# Allegro board MB1166.brd
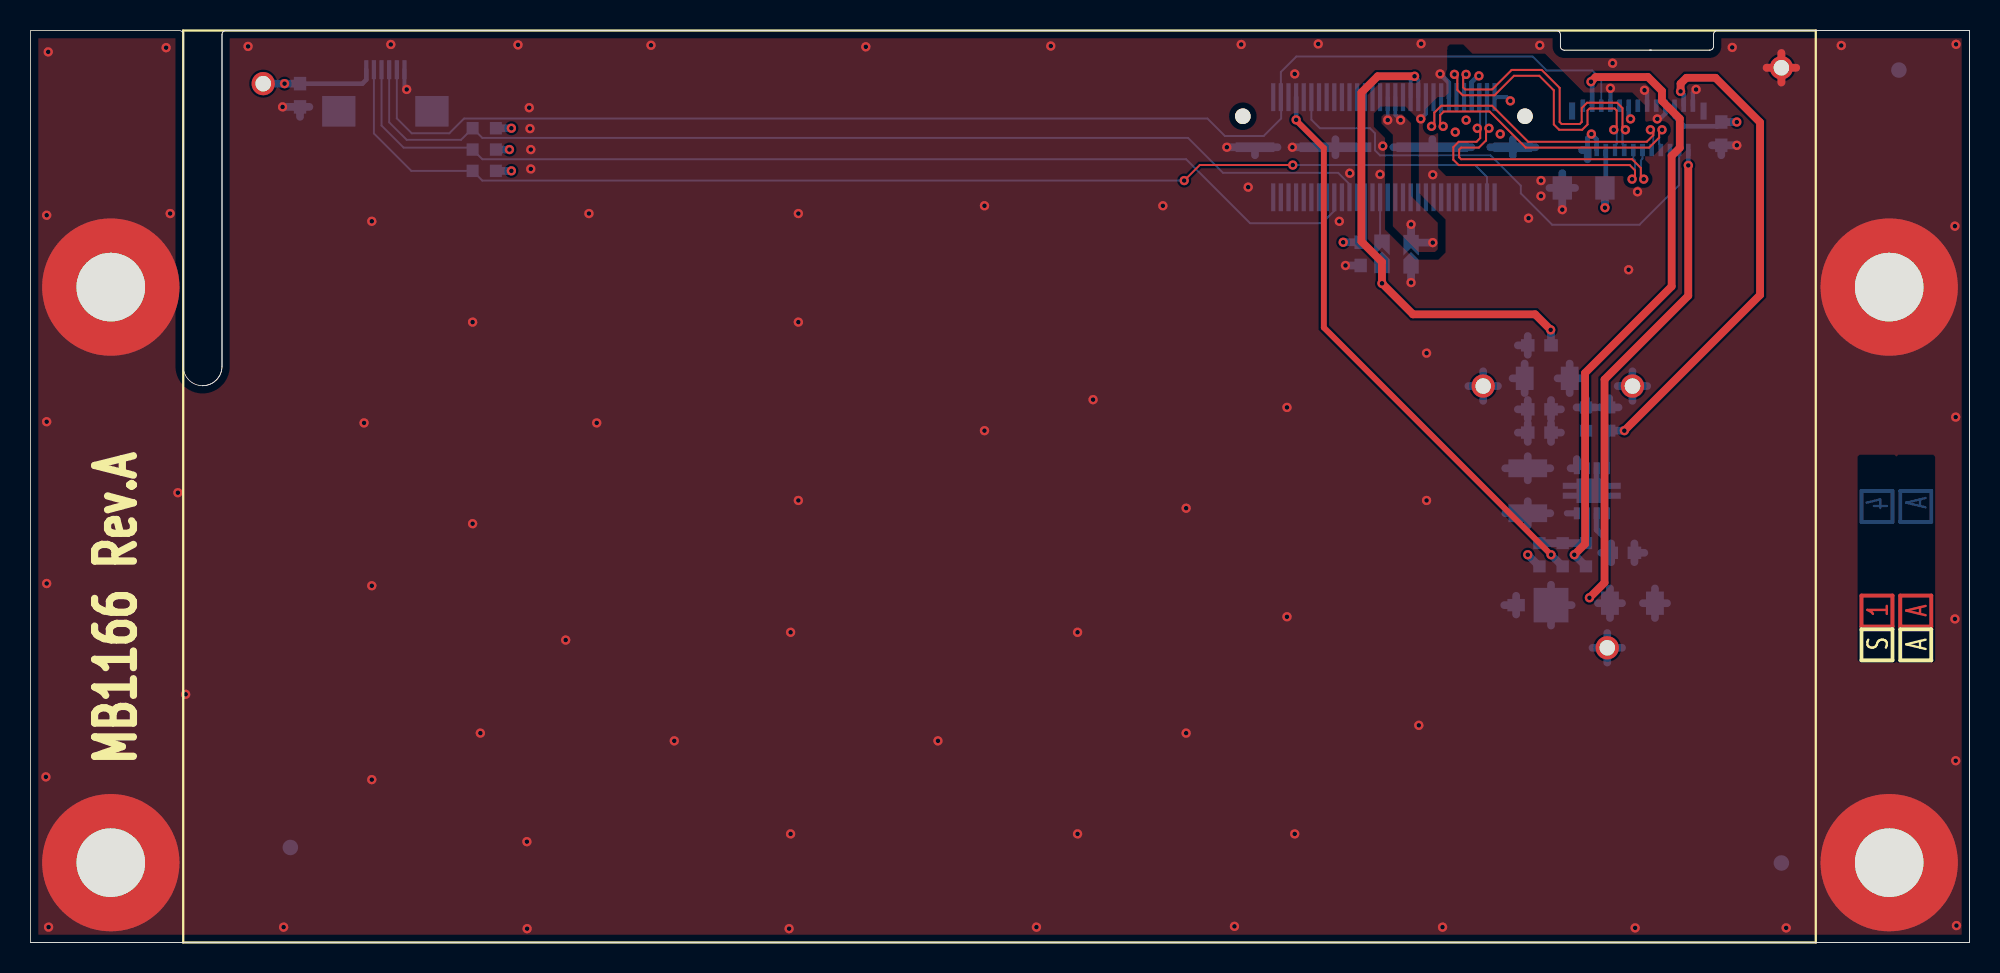
[diagram p0: board, top side]
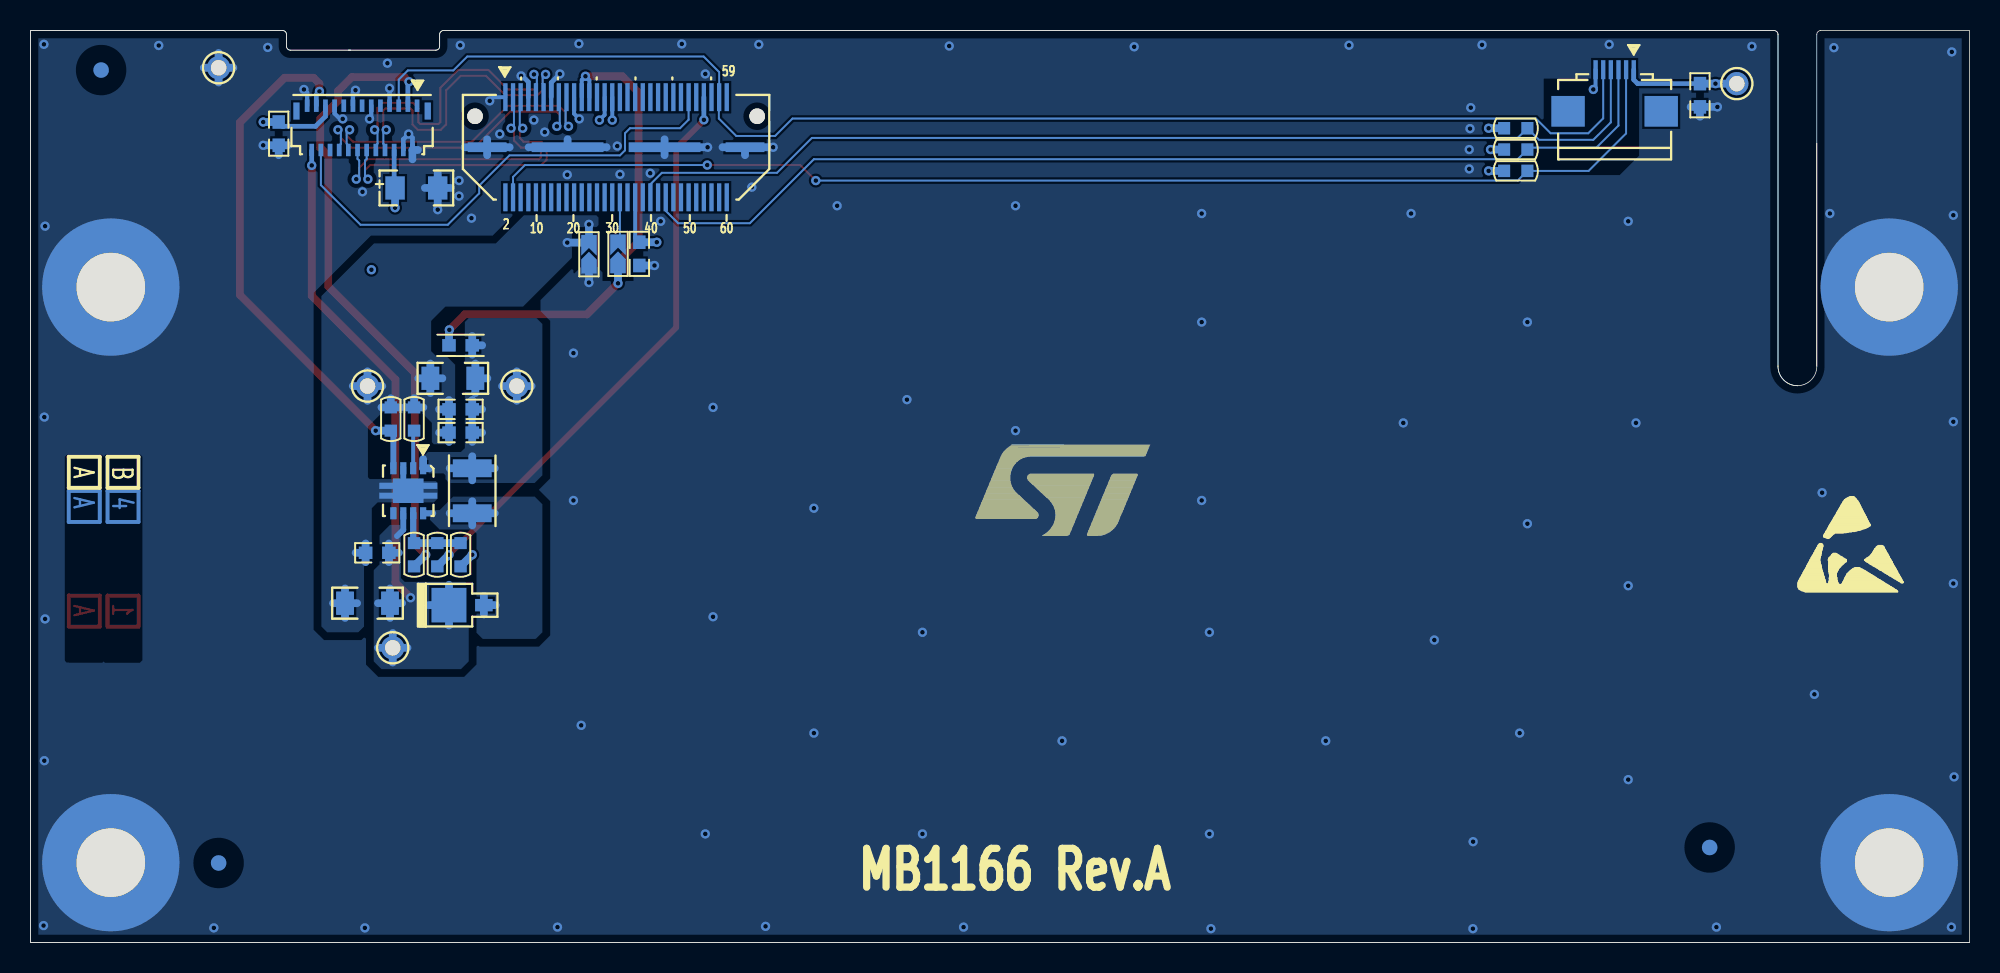
[diagram p1: board, bottom side, seen from below]

Outline 127 x 59.74 mm; copper layers: TOP, L2_GND, L3_VCC, BOTTOM. Coordinates in mm from the lower left corner of the outline.
Outline path: 0,0 0,59.74 9.75,59.74 arc(9.93,59.67) 10,59.49 10,52.35 ; 0,0 127,0 ; 0,0 127,0 ; 127,0 127,59.74 ; 127,0 127,59.74 ; 10,52.35 10,37.74 ; 10,52.35 10,37.74 ; 10,37.74 arc(10.37,36.85) 11.27,36.47 ; 11.27,36.47 arc(12.17,36.85) 12.54,37.74 ; 11.27,36.47 arc(12.17,36.85) 12.54,37.74 ; 12.54,59.49 12.54,37.74 ; 12.54,59.49 arc(12.62,59.67) 12.79,59.74 ; 12.54,59.49 arc(12.62,59.67) 12.79,59.74 ; 12.54,59.49 12.54,37.74 ; 12.79,59.74 99.95,59.74 ; 12.79,59.74 99.95,59.74 ; 99.95,59.74 arc(100.13,59.67) 100.2,59.49 ; 99.95,59.74 arc(100.13,59.67) 100.2,59.49 ; 100.2,59.49 100.2,58.71 ; 100.2,59.49 100.2,58.71 ; 100.2,58.71 arc(100.28,58.53) 100.46,58.45 ; 100.2,58.71 arc(100.28,58.53) 100.46,58.45 ; 100.46,58.45 106.17,58.45 ; 100.46,58.45 106.17,58.45 ; 106.17,58.45 106.05,58.45 ; 106.05,58.45 109.98,58.45 ; 106.05,58.45 109.98,58.45 ; 109.98,58.45 arc(110.16,58.53) 110.24,58.71 ; 109.98,58.45 arc(110.16,58.53) 110.24,58.71 ; 110.24,59.49 110.24,58.71 ; 110.24,59.49 arc(110.31,59.67) 110.49,59.74 ; 110.24,59.49 arc(110.31,59.67) 110.49,59.74 ; 110.24,59.49 110.24,58.71 ; 110.49,59.74 127,59.74 ; 110.49,59.74 127,59.74

## Design rules (mm)
net group DIFFPAIR0: nets HSSI_CLK_N HSSI_CLK_P
net group DIFFPAIR1: nets HSSI_D0_N HSSI_D0_P
net group DIFFPAIR2: nets HSSI_D1_N HSSI_D1_P

## Placement (name value [footprint] x y rotation side)
C1  4.7uF_50V  [1206C]  104.93 22.23 0 bottom
C2  10nF  [0603C]  104.29 25.53 180 bottom
C3  100nF  [0603C]  98.83 34.92 180 bottom
C4  10nF  [0603C]  98.83 33.4 180 bottom
C5  4.7uF_10V  [1206C]  99.34 36.96 0 bottom
C6  4.7uF  [TAN-A]  101.73 49.43 0 bottom
C7  100nF  [0603C]  110.74 52.98 90 bottom
C8  100nF  [0603C]  87.12 45.11 90 bottom
C9  100nF  [0603C]  17.65 55.5 90 bottom
CN1  -  [QTH-030-02-F-D-A]  88.65 52.09 180 bottom
CN2  FH26-25S-0.3SHW  [FPC25_FPC03025-1420]  105.28 53.36 0 bottom
CN3  FH19C-6S-05SH  [FH19C-6S-0R5SH_FPC_CPT]  23.24 57.17 180 bottom
H1  POSITION HOLE  [HOLE_C9D4R5]  121.74 5.23 0 top
H2  POSITION HOLE  [HOLE_C9D4R5]  5.26 5.23 0 top
H3  POSITION HOLE  [HOLE_C9D4R5]  121.74 42.93 0 top
H4  POSITION HOLE  [HOLE_C9D4R5]  5.26 42.93 0 top
L1  BEAD  [0603L]  98.83 39.12 180 bottom
L2  4.7uH(1A)  [1210L]  98.07 29.59 270 bottom
NOREF  -  []  0 0 0 top
NOREF#2  -  []  0 0 90 top
NOREF#3  -  []  121.7 21.71 90 top
NOREF#4  -  []  4.06 -24.89 0 top
NOREF#5  Value  []  63.47 29.87 0 top
NOREF#6  -  []  0 0 0 top
NOREF#7  -  []  177.24 162.03 0 top
NOREF#8  -  []  124.24 21.71 90 top
NOREF#9  -  []  -2.29 97 0 top
NOREF#10  -  []  166.72 127.75 0 top
NOREF#11  -  []  371.09 -81.28 0 top
NOREF#12  -  [unnamed#2]  114.68 5.21 180 bottom
NOREF#13  -  [unnamed#2]  122.38 57.15 180 bottom
NOREF#14  -  [unnamed#2]  17.02 6.22 180 bottom
R1  0  [0603R]  101.88 25.4 270 bottom
R2  100K  [0603R]  101.88 34.29 90 bottom
R3  10  [0603R]  103.4 34.29 270 bottom
R4  [N_A]  [0603R]  100.35 25.4 270 bottom
R5  4K7  [0603R]  98.83 25.4 270 bottom
R6  [N_A]  [0603R]  29.72 51.94 0 bottom
R7  [N_A]  [0603R]  29.72 53.34 0 bottom
R8  4K7  [0603R]  29.72 50.55 180 bottom
SB1  Open  [SB_0603]  88.52 45.11 270 bottom
SB2  Open  [SB_0603]  90.42 45.09 270 bottom
TP1  mco1  [TP]  114.68 57.3 180 bottom
TP2  mco1  [TP]  104.93 36.45 90 bottom
TP3  mco1  [TP]  15.24 56.26 0 bottom
TP4  mco1  [TP]  103.28 19.3 90 bottom
TP5  mco1  [TP]  95.15 36.45 90 bottom
U1  STLD40DPUR  [SON8_0R65_3X3]  102.26 29.59 0 bottom
Z1  STPS1L40M  [DO-216AA]  97.31 22.1 0 bottom

## Library data of the parts
C1 C5 = 1206C
C2-C4 C7-C9 = 0603C
C6 = TAN-A
CN1 = QTH-030-02-F-D-A
CN2 = FPC25_FPC03025-1420
CN3 = FH19C-6S-0R5SH_FPC_CPT
H1-H4 = HOLE_C9D4R5
L1 = 0603L
L2 = 1210L
R1-R8 = 0603R
SB1 SB2 = SB_0603
TP1-TP5 = TP
U1 = SON8_0R65_3X3
Z1 = DO-216AA

## Footprints (pads in the part's own frame, mm; a bottom-side part is the same pattern mirrored in y, then rotated)
0603C
  rect 0.889x0.813 smd: 1(-0.762,0) 2(0.762,0)
0603L
  rect 0.889x0.813 smd: 1(-0.762,0) 2(0.762,0)
0603R
  rect 0.787x0.813 smd: 1(-0.762,0) 2(0.762,0)
1206C
  rect 1.168x1.524 smd: 1(-1.473,0) 2(1.473,0)
1210L
  rect 1.168x2.54 smd: 1(-1.473,0) 2(1.473,0)
DO-216AA
  rect 1.143x0.813 smd: 1(0,0)
  rect 2.286x2.261 smd: 2(2.286,0)
FH19C-6S-0R5SH_FPC_CPT
  rect 0.279x1.245 smd: 1(1.25,0) 2(0.75,0) 3(0.25,0) 4(-0.25,0) 5(-0.75,0) 6(-1.25,0)
  rect 2.184x2.007 smd: 7(-3.05,-2.725) 8(3.05,-2.725)
FPC25_FPC03025-1420
  rect 0.406x1.118 smd: (-4.3,-1.1) (4.3,-1.1)
  rect 0.305x0.813 smd: 1(-3.6,-1.45) 2(-3.3,1.45) 3(-3,-1.45) 4(-2.7,1.45) 5(-2.4,-1.45) 6(-2.1,1.45) 7(-1.8,-1.45) 8(-1.5,1.45) 9(-1.2,-1.45) 10(-0.9,1.45) 11(-0.6,-1.45) 12(-0.3,1.45) 13(0,-1.45) 14(0.3,1.45) 15(0.6,-1.45) 16(0.9,1.45) 17(1.2,-1.45) 18(1.5,1.45) 19(1.8,-1.45) 20(2.1,1.45) 21(2.4,-1.45) 22(2.7,1.45) 23(3,-1.45) 24(3.3,1.45) 25(3.6,-1.45)
HOLE_C9D4R5
  round 8.992 hole 4.496: 1(0,0)
QTH-030-02-F-D-A
  round 1.016 hole 1.016 unplated: (-9.24,2.03) (9.24,2.03)
  rect 0.279x1.829 smd: 1(-7.25,3.28) 2(-7.25,-3.28) 3(-6.75,3.28) 4(-6.75,-3.28) 5(-6.25,3.28) 6(-6.25,-3.28) 7(-5.75,3.28) 8(-5.75,-3.28) 9(-5.25,3.28) 10(-5.25,-3.28) 11(-4.75,3.28) 12(-4.75,-3.28) 13(-4.25,3.28) 14(-4.25,-3.28) 15(-3.75,3.28) 16(-3.75,-3.28) 17(-3.25,3.28) 18(-3.25,-3.28) 19(-2.75,3.28) 20(-2.75,-3.28) 21(-2.25,3.28) 22(-2.25,-3.28) 23(-1.75,3.28) 24(-1.75,-3.28) 25(-1.25,3.28) 26(-1.25,-3.28) 27(-0.75,3.28) 28(-0.75,-3.28) 29(-0.25,3.28) 30(-0.25,-3.28) 31(0.25,3.28) 32(0.25,-3.28) 33(0.75,3.28) 34(0.75,-3.28) 35(1.25,3.28) 36(1.25,-3.28) 37(1.75,3.28) 38(1.75,-3.28) 39(2.25,3.28) 40(2.25,-3.28) 41(2.75,3.28) 42(2.75,-3.28) 43(3.25,3.28) 44(3.25,-3.28) 45(3.75,3.28) 46(3.75,-3.28) 47(4.25,3.28) 48(4.25,-3.28) 49(4.75,3.28) 50(4.75,-3.28) 51(5.25,3.28) 52(5.25,-3.28) 53(5.75,3.28) 54(5.75,-3.28) 55(6.25,3.28) 56(6.25,-3.28) 57(6.75,3.28) 58(6.75,-3.28) 59(7.25,3.28) 60(7.25,-3.28)
  rect 2.54x0.635 smd: 61(-8.445,0) 64(8.445,0)
  rect 4.699x0.635 smd: 62(-3.175,0) 63(3.175,0)
SB_0603
  round 0.152 smd: 1(-0.762,0) 2(0.762,0)
SON8_0R65_3X3
  rect 0.406x0.787 smd: 1(-0.975,-1.475) 2(-0.325,-1.475) 3(0.325,-1.475) 4(0.975,-1.475) 5(0.975,1.475) 6(0.325,1.475) 7(-0.325,1.475) 8(-0.975,1.475)
  custom 3.8x1.6 smd: 9(0,0)
TAN-A
  rect 1.27x1.524 smd: 1(1.397,0) 2(-1.397,0)
TP
  round 1.524 hole 1.016: 1(0,0)
unnamed#2
  round 1.016 smd: (0,0)

## Nets
GND: C6.2 C7.1 C8.1 C9.1 CN1.1 CN1.7 CN1.13 CN1.19 CN1.61 CN1.62 CN1.63 CN1.64 CN2.2 CN2.4 CN2.7 CN2.11 CN2.15 CN2.19 CN2.25 CN3.6 H1.1 H2.1 H3.1 H4.1 SB2.2 TP1.1
VDD: C6.1 C7.2 C8.2 C9.2 CN1.36 CN2.6 CN2.21 CN3.1 R5.2 R6.2 R7.2 R8.1 TP3.1
A: C1.1 C2.2 CN2.24 TP4.1 U1.6 Z1.2
BL_CTRL: CN1.53 R4.2
BLGND: C1.2 C2.1 C3.1 C4.1 C5.2 CN1.27 CN1.29 R2.2 R3.1 SB2.1 TP2.1 U1.3 U1.9
BLVDD: CN1.21 CN1.23 L1.1 SB1.2
CABC: CN2.3 R1.2
HSSI_CLK_N: CN1.5 CN2.12
HSSI_CLK_P: CN1.3 CN2.14
HSSI_D0_N: CN1.11 CN2.8
HSSI_D0_P: CN1.9 CN2.10
HSSI_D1_N: CN1.17 CN2.16
HSSI_D1_P: CN1.15 CN2.18
I2C_SCL: CN1.44 CN3.3 R6.1
I2C_SDA: CN1.40 CN3.4 R7.1
INT: CN1.4 CN3.2 R8.2
K: CN2.23 R3.2 U1.4
NETCN1_32: CN1.32 SB1.1
NETL2_2: L2.2 U1.8 Z1.1
NETR1_1: R1.1 R4.1 R5.1 U1.7
NETR2_1: R2.1 U1.2
RST: CN1.57 CN2.5 CN3.5
TE: CN1.49 CN2.22
VL: C3.2 C4.2 C5.1 L1.2 L2.1 TP5.1 U1.1

Pads without a net: CN1 2 6 8 10 12 14 16 18 20 22 24 25 26 28 30 31 33 34 35 37 38 39 41 42 43 45 46 47 48 50 51 52 54 55 56 58 59 60; CN2 1 9 13 17 20; CN3 7 8; U1 5

## Via types
v1: diameter 0.61, hole 0.305, TOP to BOTTOM, 143 vias

## Routing (per net, layer and track width the routed paths; a pad name or vN(x,y) marks a point on that pad's centre or on a via; arc(x,y) is an arc through that point)
GND: length 52.1
  TOP w0.508: 113.72,57.3 TP1.1 ; TP1.1 115.65,57.3 ; TP1.1 114.68,58.27 ; TP1.1 114.68,56.34
  BOTTOM w0.254: CN3.6 24.49,56.03 v1(24.64,55.88) ; CN1.1 96.68,55.37 v1(96.93,55.13) ; v1(91.06,53.95) 91.4,54.29 CN1.19
  BOTTOM w0.279: v1(106.55,53.95) 106.73,53.95 107.08,54.3 CN2.19 ; CN2.11 104.68,54.07 v1(104.8,53.95) ; CN2.15 105.88,55.66 v1(105.71,55.83) ; v1(109.09,55.88) 108.88,55.67 CN2.25 ; CN2.7 v1(103.48,55.96)
  BOTTOM w0.305: v1(92.33,56.9) 92.9,56.33 CN1.13 ; v1(94.87,56.77) 94.79,56.77 94.4,56.37 CN1.7 ; CN2.4 102.58,52.61 v1(102.23,52.96) 101.98,52.71 CN2.2
  BOTTOM w0.508: 110.74,51.57 C7.1 ; C7.1 v1(111.76,52.22) ; C7.1 110.13,52.22 ; 99.49,49.43 C6.2 ; C6.2 v1(100.33,48.01) ; C6.2 101.17,49.43 ; C6.2 100.33,50.39 ; CN1.62 91.82,52.62 ; CN1.62 89.27,52.09 ; CN1.62 94.37,52.09 ; CN1.63 v1(82.65,52.09) ; CN1.63 85.47,52.62 ; CN1.63 85.47,51.57 ; C9.1 18.26,54.74 ; C9.1 v1(16.51,54.74) ; C9.1 17.65,54.09 ; 97.09,51.57 CN1.61 ; CN1.61 95.62,52.09 ; CN1.61 97.09,52.62 ; CN1.61 98.56,52.09 ; TP1.1 115.65,57.3 ; TP1.1 114.68,58.27 ; TP1.1 113.72,57.3 ; TP1.1 114.68,56.34 ; CN1.64 v1(78.36,52.09) ; CN1.64 81.67,52.09 ; CN1.64 80.2,51.57 ; C8.1 v1(86.13,44.35) ; SB2.2 v1(90.42,43.23) ; 101.98,51.3 CN2.2 101.63,51.91
  vias: v1(1.01,10.85) v1(1.06,47.64) v1(1.06,34.11) v1(1.06,23.52) v1(1.16,58.34) v1(1.18,1.01) v1(8.88,58.62) v1(9.14,47.75) v1(9.65,29.46) v1(10.16,16.26) v1(14.25,58.7) v1(16.58,1.01) v1(21.84,34.04) v1(22.35,47.24) v1(22.35,23.37) v1(22.35,10.67) v1(23.6,58.83) v1(28.96,40.64) v1(28.96,27.43) v1(29.46,13.72) v1(31.93,58.8) v1(32.51,6.6) v1(32.53,0.9) v1(32.66,54.69) v1(32.72,53.31) v1(32.77,51.94) v1(32.77,50.67) v1(35.05,19.81) v1(36.58,47.75) v1(37.08,34.04) v1(40.64,58.78) v1(42.16,13.21) v1(49.69,0.9) v1(49.78,20.32) v1(49.78,7.11) v1(50.29,47.75) v1(50.29,40.64) v1(50.29,28.96) v1(54.71,58.67) v1(59.44,13.21) v1(62.48,48.26) v1(62.48,33.53) v1(65.89,1.01) v1(66.83,58.72) v1(68.58,20.32) v1(68.58,7.11) v1(69.6,35.56) v1(74.17,48.26) v1(75.69,28.45) v1(75.69,13.72) v1(78.86,1.06) v1(79.3,58.83) v1(79.76,49.48) v1(82.3,35.05) v1(82.3,21.34) v1(82.8,56.9) v1(82.8,7.11) v1(84.34,58.86) v1(85.72,47.24) v1(86.41,50.39) v1(88.39,50.32) v1(88.57,52.17) v1(90.93,14.22) v1(91.08,58.87) v1(91.44,38.61) v1(91.44,28.96) v1(91.85,50.29) v1(92.49,1.01) v1(93.32,53.09) v1(94.03,53.87) v1(96.27,52.96) v1(98.12,47.45) v1(98.85,58.77) v1(98.93,49.91) v1(98.93,48.9) v1(103.62,57.6) v1(104.67,44.07) v1(105.1,0.96) v1(105.26,49.17) v1(111.46,58.63) v1(114.99,0.96) v1(118.6,58.76) v1(126.05,46.92) v1(126.05,21.19) v1(126.12,58.84) v1(126.1,34.42) v1(126.1,11.91) v1(126.15,1.11)
VDD: length 24.7
  BOTTOM w0.254: CN1.36 87.4,46.15 C8.2
  BOTTOM w0.305: CN2.6 103.18,49.49 C6.1 ; CN2.21 107.68,54.11 108.33,53.47 110.47,53.47 C7.2 ; CN3.1 21.99,56.52 21.74,56.26 C9.2
  BOTTOM w0.508: C8.2 v1(85.98,45.87) ; R5.2 v1(98.07,25.4) ; v1(31.37,51.94) R6.2 ; C9.2 v1(16.64,56.26) TP3.1 ; C6.1 v1(103.12,48.13) ; R8.1 v1(31.5,50.55) ; v1(31.5,53.34) R7.2 ; v1(111.76,53.75) C7.2
A: length 46.9
  TOP w0.508: v1(108.58,50.9) 108.58,42.37 103.1,36.88 103.1,23.57 v1(102.11,22.58)
  BOTTOM w0.305: CN2.24 v1(108.58,50.9)
  BOTTOM w0.381: U1.6 102.59,27.03 103,26.62
  BOTTOM w0.508: C2.2 103.53,26.14 ; C2.2 103.53,24.92 ; C2.2 102.88,25.53 ; 102.67,22.23 C1.1 ; C1.1 103.45,21.26 ; C1.1 103.45,23.19 ; C1.1 104.24,22.23 ; 103.28,18.34 TP4.1 ; TP4.1 104.24,19.3 ; TP4.1 103.28,20.27 ; TP4.1 102.31,19.3 ; Z1.2 100.94,22.1 ; Z1.2 99.59,23.43 ; Z1.2 99.59,20.76
BL_CTRL: length 38
  TOP w0.381: v1(82.9,53.89) 82.9,53.86 84.71,52.04 84.71,40.28 v1(99.59,25.4)
  BOTTOM w0.305: CN1.53 v1(82.9,53.89)
  BOTTOM w0.508: R4.2 v1(99.59,25.4)
BLGND: length 27.5
  BOTTOM w0.254: CN1.27 89.4,54.22 v1(89.74,53.87) ; CN1.29 v1(88.9,53.87)
  BOTTOM w0.381: U1.9 102.59,29.92 U1.3
  BOTTOM w0.508: C1.2 107.19,22.23 ; C1.2 105.61,22.23 ; C1.2 106.4,21.26 ; C1.2 106.4,23.19 ; 100.02,36.96 C5.2 ; C5.2 101.6,36.96 ; C5.2 100.81,35.99 ; C5.2 100.81,37.92 ; C4.1 99.59,34.01 ; C4.1 100.24,33.4 ; C4.1 99.59,32.79 ; 105.05,24.92 C2.1 ; C2.1 105.05,26.14 ; C2.1 105.7,25.53 ; TP2.1 105.89,36.45 ; TP2.1 104.93,35.48 ; TP2.1 103.96,36.45 ; TP2.1 104.93,37.41 ; v1(91.85,45.85) SB2.1 v1(90.42,47.04) ; R2.2 101.88,35.65 ; R2.2 102.49,35.05 ; R2.2 101.27,35.05 ; 102.79,35.05 R3.1 ; R3.1 104.01,35.05 ; R3.1 103.4,35.65 ; C3.1 100.24,34.92 ; C3.1 99.59,35.54 ; C3.1 99.59,34.31
BLVDD: length 34.4
  TOP w0.508: v1(99.57,40.13) 98.55,41.15 90.55,41.15 v1(88.52,43.18) 88.52,44.58 87.17,45.92 87.17,55.68 88.24,56.74 v1(90.65,56.74)
  BOTTOM w0.254: CN1.21 90.9,56.5 v1(90.65,56.74) 90.4,56.49 CN1.23
  BOTTOM w0.508: SB1.2 v1(88.52,43.18) ; v1(99.57,40.13) 99.59,40.11 L1.1
CABC: length 41.6
  TOP w0.508: v1(102.21,56.39) 102.51,56.69 105.94,56.69 106.86,55.78 106.86,55.14 108.03,53.97 108.03,52.06 107.49,51.53 107.49,42.98 101.82,37.31 101.82,26.11 v1(101.12,25.4)
  BOTTOM w0.305: v1(102.21,56.39) 102.28,56.31 CN2.3
  BOTTOM w0.508: R1.2 v1(101.12,25.4)
HSSI_CLK_N: length 20.6
  TOP w0.13: v1(104.9,50) 105.09,50.19 105.09,50.58 104.74,50.93 93.54,50.93 93.19,51.28 93.19,52.1 93.54,52.45 94.71,52.45 94.96,52.7 94.96,53.15 v1(94.76,53.34)
  BOTTOM w0.13: v1(94.76,53.34) 94.96,53.53 94.96,54.48 94.9,54.54 CN1.5 ; CN2.12 104.98,51.33 105.09,51.22 105.09,50.19 v1(104.9,50)
HSSI_CLK_P: length 20.6
  TOP w0.13: v1(105.66,50) 105.47,50.19 105.47,50.74 104.9,51.31 93.7,51.31 93.57,51.44 93.57,51.94 93.7,52.07 94.87,52.07 95.34,52.54 95.34,53.15 v1(95.53,53.34)
  BOTTOM w0.13: CN2.14 105.58,51.33 105.47,51.22 105.47,50.19 v1(105.66,50) ; v1(95.53,53.34) 95.34,53.53 95.34,54.48 95.4,54.54 CN1.3
HSSI_D0_N: length 20.6
  TOP w0.13: v1(103.7,53.24) 103.89,53.43 103.89,54.5 103.77,54.63 102.11,54.63 101.98,54.5 101.98,53.59 101.63,53.24 100.13,53.24 99.78,53.59 99.78,55.83 98.82,56.78 97.17,56.78 95.89,55.5 93.81,55.5 93.46,55.85 93.46,56.68 v1(93.26,56.87)
  BOTTOM w0.13: CN2.8 103.78,52.21 103.89,52.32 103.89,53.05 v1(103.7,53.24) ; CN1.11 93.4,56.21 93.46,56.27 93.46,56.7 93.29,56.87 v1(93.26,56.87)
HSSI_D0_P: length 20.5
  TOP w0.13: v1(94.03,56.87) 93.84,56.68 93.84,56.01 93.97,55.88 95.73,55.88 97.01,57.16 98.98,57.16 100.16,55.98 100.16,53.75 100.28,53.62 101.47,53.62 101.6,53.75 101.6,54.66 101.95,55.01 103.92,55.01 104.27,54.66 104.27,53.43 v1(104.46,53.24)
  BOTTOM w0.13: v1(94.03,56.87) 94,56.87 93.84,56.7 93.84,56.3 93.9,56.24 CN1.9 ; v1(104.46,53.24) 104.27,53.05 104.27,52.32 104.38,52.21 CN2.10
HSSI_D1_N: length 20.6
  TOP w0.13: v1(91.76,53.46) 91.95,53.65 91.95,54.36 92.41,54.81 95.73,54.81 98.09,52.45 105.86,52.45 106.29,52.88 106.29,53.05 v1(106.1,53.24)
  BOTTOM w0.13: CN1.17 91.9,54.54 91.96,54.48 91.96,53.65 v1(91.76,53.46) ; v1(106.1,53.24) 106.29,53.05 106.29,52.32 106.18,52.21 CN2.16
HSSI_D1_P: length 20.6
  TOP w0.13: v1(92.53,53.46) 92.33,53.66 92.33,54.2 92.56,54.43 95.57,54.43 97.94,52.07 106.02,52.07 106.67,52.72 106.67,53.05 v1(106.86,53.24)
  BOTTOM w0.13: v1(106.86,53.24) 106.67,53.05 106.67,52.32 106.78,52.21 CN2.18 ; CN1.15 92.4,54.54 92.34,54.48 92.34,53.65 v1(92.53,53.46)
I2C_SCL: length 69.9
  BOTTOM w0.127: CN3.3 22.99,53.51 24.43,52.07 28.83,52.07 R6.1 29.59,51.31 75.69,51.31 79.88,47.12 84.58,47.12 85.4,47.93 CN1.44
I2C_SDA: length 69.5
  BOTTOM w0.127: CN3.4 23.49,53.73 24.64,52.58 28.19,52.58 R7.1 29.59,52.7 75.82,52.7 78.11,50.42 85.65,50.42 86.4,49.67 CN1.40
INT: length 80.4
  TOP w0.127: v1(75.56,49.91) 76.58,50.93 v1(82.68,50.93)
  BOTTOM w0.127: v1(75.56,49.91) 29.59,49.91 R8.2 24.94,50.55 22.49,53 CN3.2 ; CN1.4 95.4,50.15 94.61,50.93 v1(82.68,50.93)
K: length 35.5
  TOP w0.508: v1(104.39,33.53) 113.28,42.42 113.28,53.72 110.36,56.64 108.46,56.64 108.08,56.26 v1(108.08,55.75)
  BOTTOM w0.305: CN2.23 108.28,55.55 v1(108.08,55.75)
  BOTTOM w0.381: R3.2 103.23,33.36 U1.4
  BOTTOM w0.508: R3.2 v1(104.39,33.53)
NETCN1_32: length 2.8
  BOTTOM w0.127: CN1.32 88.4,45.97
NETL2_2: length 7.2
  BOTTOM w0.406: U1.8 100.63,28.12
  BOTTOM w0.508: Z1.1 97.31,22.71 ; Z1.1 96.53,22.1 ; Z1.1 97.31,21.49 ; 96.6,28.12 L2.2 ; L2.2 98.07,27.33 ; L2.2 98.07,28.91 ; L2.2 99.54,28.12
NETR1_1: length 5
  BOTTOM w0.406: R1.1 101.93,26.22 U1.7
  BOTTOM w0.508: R1.1 R4.1 R5.1
NETR2_1: length 2.5
  BOTTOM w0.254: U1.2 101.93,33.47 R2.1
RST: length 89.7
  BOTTOM w0.127: CN2.5 102.88,56.53 102.29,57.12 99.3,57.12 98.39,58.04 82.91,58.04 81.9,57.02 CN1.57 81.92,55.36 81.92,53.98 80.77,52.83 78.23,52.83 77.09,53.98 28.4,53.98 27.43,53.01 24.97,53.01 23.99,53.99 CN3.5
TE: length 32.7
  BOTTOM w0.127: CN2.22 107.98,49.61 105.38,47.02 99.67,47.02 97.61,49.07 97.61,49.58 95.63,51.56 88.39,51.56 88.06,51.89 88.06,53.01 87.73,53.34 84.45,53.34 83.9,53.9 CN1.49
VL: length 17.7
  BOTTOM w0.508: 97.42,34.92 C3.2 ; C3.2 98.07,35.54 ; C3.2 98.07,34.31 ; 97.87,35.99 C5.1 ; C5.1 97.87,37.92 ; C5.1 97.08,36.96 ; L1.2 98.07,39.73 ; L1.2 98.07,38.51 ; L1.2 97.42,39.12 ; 94.18,36.45 TP5.1 ; TP5.1 96.11,36.45 ; TP5.1 95.15,35.48 ; TP5.1 95.15,37.41 ; 100.88,31.07 U1.1 101.28,31.66 ; 98.07,30.28 L2.1 ; L2.1 98.07,31.85 ; L2.1 99.54,31.06 ; L2.1 96.6,31.06 ; 98.07,32.79 C4.2 ; C4.2 98.07,34.01 ; C4.2 97.42,33.4

## Copper pours and planes (outline as drawn; the poured copper is in the pictures)
GND on BOTTOM (solid shape): 90.93,44.74 90.93,43.81 89.92,43.81 89.92,44.74 90.42,45.24
GND on TOP: 110.74,59.23 126.49,59.23 126.49,0.51 0.51,0.51 0.51,59.23 9.49,59.23 9.49,37.74 11.27,35.97 13.05,37.74 13.05,59.23 99.69,59.23 99.69,58.71 99.92,58.17 100.46,57.95 109.98,57.95 110.52,58.17 110.74,58.71 ; 1 cut-out
GND on BOTTOM: 99.69,58.71 99.92,58.17 100.46,57.95 109.98,57.95 110.52,58.17 110.74,58.71 110.74,59.23 126.49,59.23 126.49,0.51 0.51,0.51 0.51,59.23 9.49,59.23 9.49,37.74 11.27,35.97 13.05,37.74 13.05,59.22 99.69,59.22 ; 10 cut-outs
GND on L2_GND: 99.69,58.71 99.92,58.17 100.46,57.95 109.98,57.95 110.52,58.17 110.74,58.71 110.74,59.23 126.49,59.23 126.49,0.51 0.51,0.51 0.51,59.23 9.49,59.23 9.49,37.74 11.27,35.97 13.05,37.74 13.05,59.23 99.69,59.23
GND on L3_VCC: 80.77,49.53 77.98,52.32 77.98,59.18 98.93,59.18 99.81,58.31 99.92,58.17 100.06,58.06 100.33,57.78 109.6,57.78 110.24,57.15 110.24,51.18 108.58,49.53
VDD on L3_VCC: 110.74,59.23 126.49,59.23 126.49,0.51 0.51,0.51 0.51,59.23 9.49,59.23 9.49,37.74 11.27,35.97 13.05,37.74 13.05,59.23 77.47,59.23 77.47,52.07 80.52,49.02 108.97,49.02 110.74,50.8
A on BOTTOM: 104.01,17.91 104.52,18.41 104.52,24.38 104.14,24.77 104.14,26.67 103.45,27.36 102.69,27.36 102.51,27.18 102.51,26.87 102.74,26.64 102.74,23.88 102.49,23.62 98.55,23.62 98.3,23.37 98.3,18.41 98.81,17.91
BLGND on BOTTOM (solid shape): 90.93,44.99 90.42,45.5 89.92,44.99 89.92,46.35 90.93,46.35
BLGND on TOP: 88.65,54.25 89.84,54.25 90.42,53.67 90.42,48.9 92.18,47.14 92.18,45.42 92,45.24 90.91,45.24 89.23,46.91 89.23,52.91 88.49,53.64 88.49,54.1
BLGND on BOTTOM: 100.58,28.83 100.33,29.08 100.33,30.1 100.58,30.35 104.78,30.35 104.9,30.48 104.9,33.78 104.01,34.67 101.35,34.67 100.71,34.04 100.71,32.77 100.46,32.51 99.31,32.51 99.19,32.64 99.19,37.85 99.69,38.35 100.38,38.35 100.76,38.73 100.76,40.72 99.82,41.66 94.74,41.66 91.54,44.86 91.54,46.56 91.24,46.86 89.93,46.86 89.8,46.99 89.8,47.5 89.94,47.64 94.68,47.64 96.52,45.8 104.5,45.8 107.95,42.34 107.95,20.7 107.57,20.32 105.54,20.32 105.16,20.7 105.16,24.64 104.65,25.15 104.65,28.45 104.27,28.83
BLVDD on BOTTOM (solid shape): 89.03,44.76 89.03,43.84 88.01,43.84 88.01,44.76 88.52,45.27
NETCN1_32 on BOTTOM (solid shape): 89.03,45.01 88.52,45.52 88.01,45.02 88.01,46.38 89.03,46.38
NETL2_2 on BOTTOM: 93.47,20.32 93.9,19.89 97.38,19.89 97.79,20.29 97.79,26.8 98.04,27.05 100.2,27.05 100.84,27.69 100.84,28.19 100.71,28.32 100.2,28.32 99.31,29.21 93.98,29.21 93.47,28.7
VL on BOTTOM: 98.55,32.38 98.81,32.13 100.97,32.13 101.35,31.75 101.35,30.86 101.22,30.73 99.95,30.73 99.82,30.61 99.82,30.35 99.57,30.1 93.98,30.1 93.47,30.61 93.47,40.51 93.85,40.89 98.3,40.89 98.55,40.64

## Text on the board
Ref Des/Silkscreen Bottom: B | A | MB1166 Rev.A
Ref Des/Silkscreen Top: S | A | MB1166 Rev.A
User.6: 1,4 | 5 | N/A | 55 OHM | +/-10%
User.7: FIGURE | SIZE | 12.0 | 40.0 | 177.0 | TOLERANCE | +3.0/-3.0 | +2.0/-2.0 | DRILL CHART: TOP to BOTTOM | ALL UNITS ARE IN MILS | PLATED | NON-PLATED | ROTATION | - | QTY | 143 | 5 | 4 | 2 | 154 | TOTAL HOLES:
